# Altium PCB DeskClock.PcbDoc
Units mil, origin at the board's own origin, x right, y up, seen from the top; angles counter-clockwise.
Board outline 3160 x 2510 mil, 2 copper layers (Top Layer, Bottom Layer); 40 components, 48 nets, 191 pads, 47 vias.
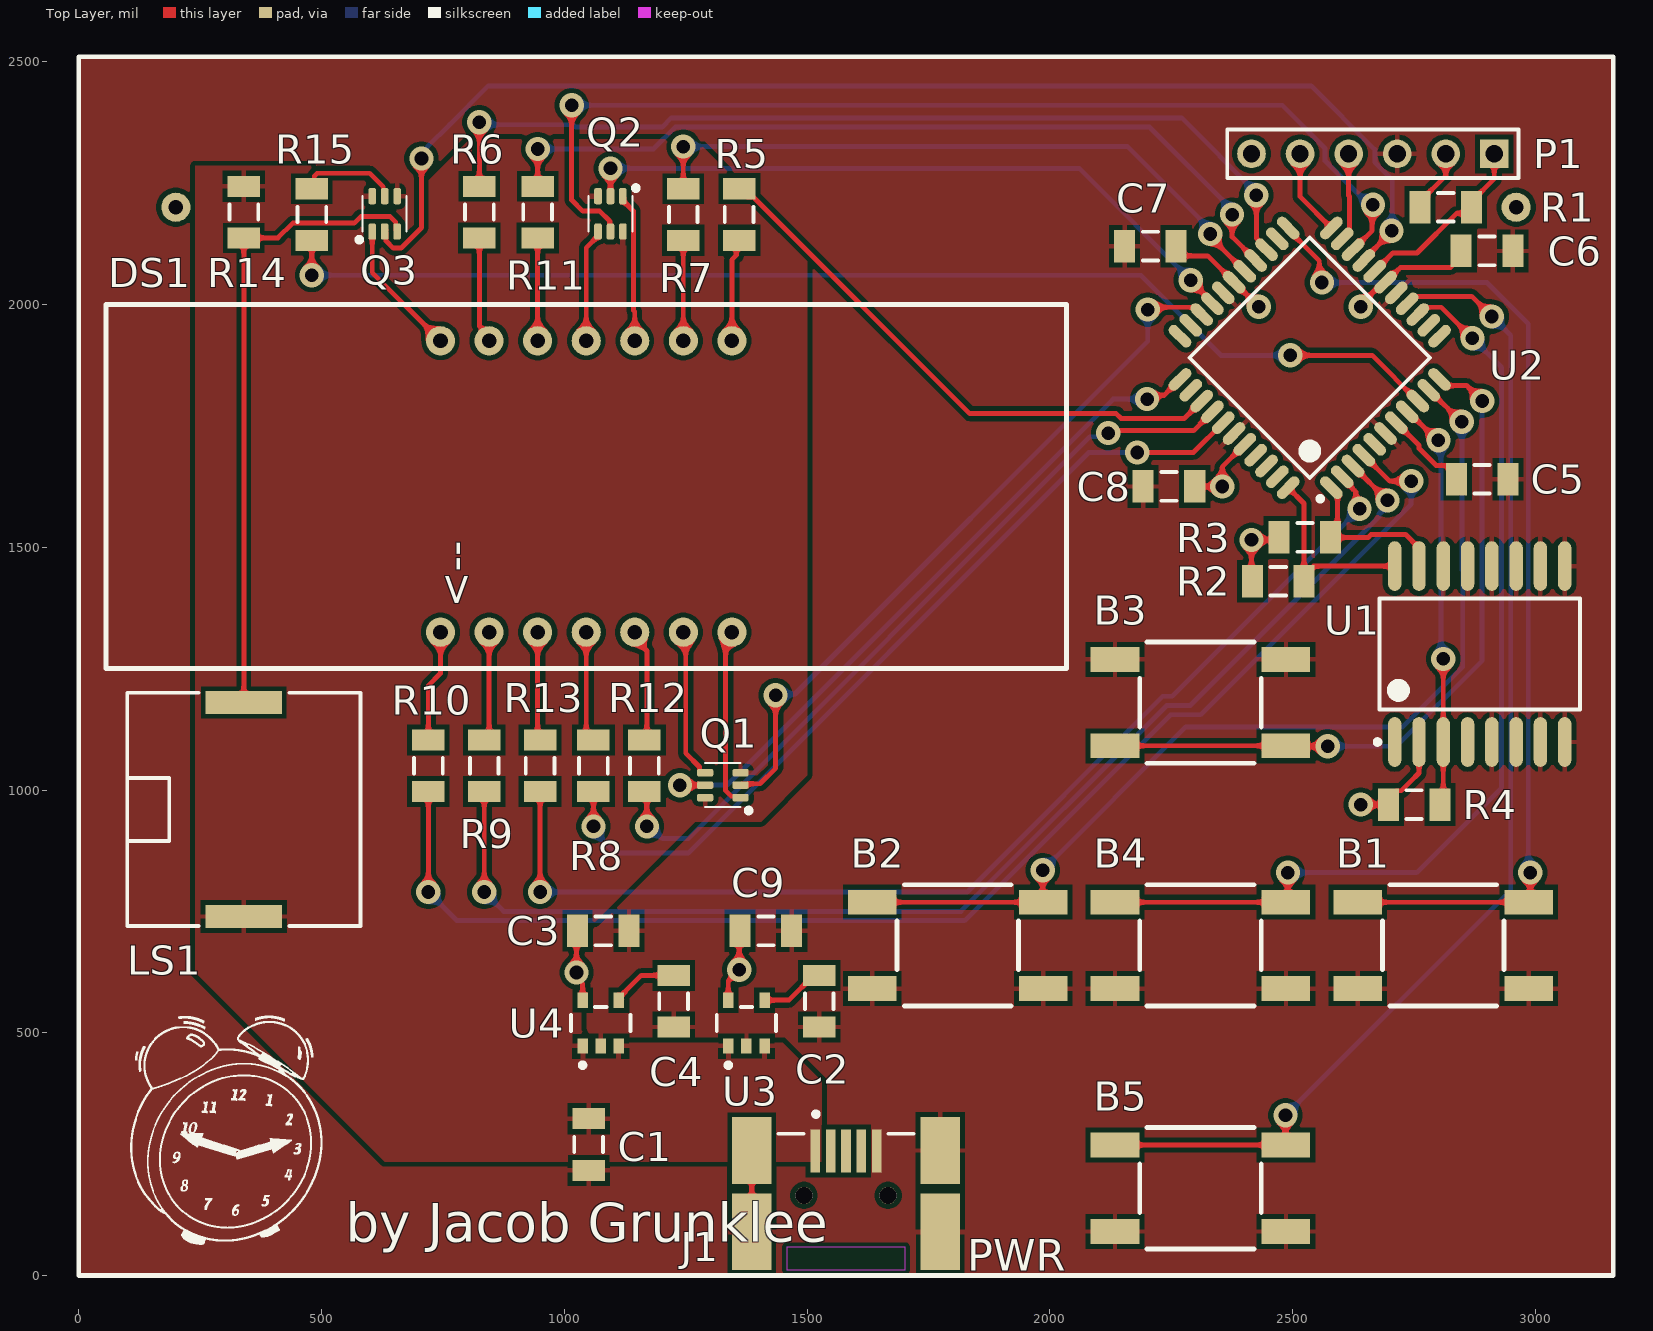
[diagram p0: Top Layer view]
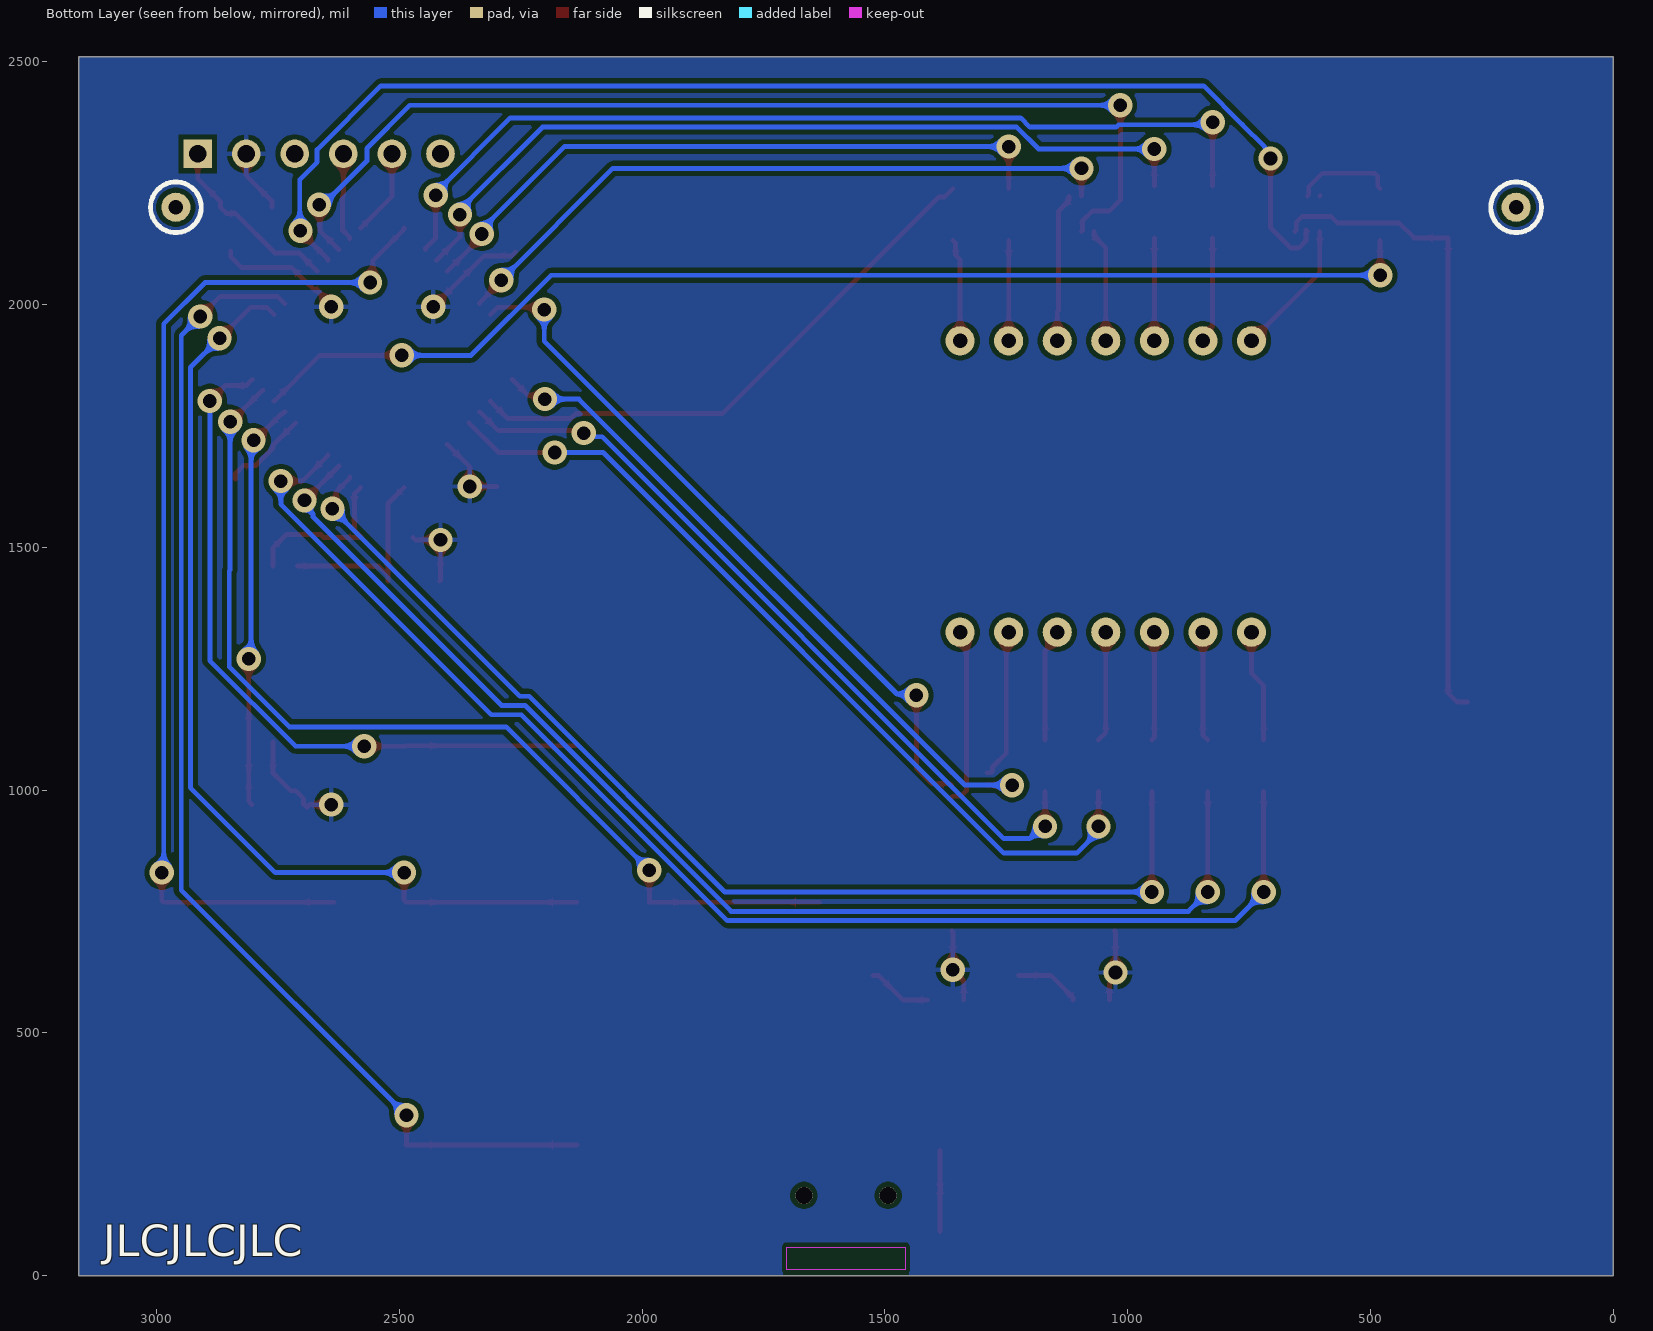
[diagram p1: Bottom Layer view, seen from below]

## Layer stack, top to bottom
Top Solder: solder mask 0.4, Solder Resist, Dk 3.5
Top Layer: signal copper 1.4
Dielectric 1: dielectric 12.6, FR-4, Dk 4.8
Bottom Layer: signal copper 1.4
Bottom Solder: solder mask 0.4, Solder Resist, Dk 3.5

## Board outline
0,0 0,2510 3160,2510 3160,0

## Design rules (kind name [scope] priority, off if disabled: settings)
Clearance [All] p1: gap=10 ignorepadtopadclearanceinfootprint=FALSE except(0: Arc-Hole Track-Hole SMDPad-Hole THPad-Hole Via-Hole Fill-Hole Poly-Hole Region-Hole Text-Hole; 9: Arc-Arc Arc-Track Arc-SMDPad Track-Track Track-SMDPad SMDPad-SMDPad)
MinimumSolderMaskSliver [All] p1: minsoldermaskwidth=1.8
PolygonConnect [All] p1: connectstyle=Relief reliefconductorwidth=10 reliefentries=4 polygonreliefangle="90 Angle" airgapwidth=10
RoutingVias [All] p1: holewidth=28 width=50 viastyle="Through Hole" minholewidth=28 minwidth=50 maxholewidth=28 maxwidth=50
SilkToSolderMaskClearance [IsPad] p1: minsilkscreentomaskgap=8 clearancetoexposedcopper=TRUE
SolderMaskExpansion [All] p1: expansion=4 istentingtop=FALSE
Width [All] p1: maxlimit=10 minlimit=10 preferedwidth=10
28 further rules are at their usual default settings.

## Components (designator, comment, footprint, x,y, rotation, side; value= is the part's Value field where it differs from the comment)
B1 "APEM ADTSM6**V Tactile Button" ADTSM6**V 2810,680 r0 top
B2 "APEM ADTSM6**V Tactile Button" ADTSM6**V 1810,680 r0 top
B3 "APEM ADTSM6**V Tactile Button" ADTSM6**V 2310,1180 r180 top
B4 "APEM ADTSM6**V Tactile Button" ADTSM6**V 2310,680 r0 top
B5 "APEM ADTSM6**V Tactile Button" ADTSM6**V 2310,180 r0 top
C1 "Cap1uF" C1206 1050,270 r90 top value=1.0uF
C2 "Cap100pF" C1206 1525,565 r90 top value=100pF
C3 "Cap2.2uF" C1206 1080,710 r180 top value=2.2uF
C4 "Cap100pF" C1206 1225,565 r90 top value=100pF
C5 "Cap10uF" C1206 2890,1640 r180 top value=10uF
C6 "Cap100pF" C1206 2900,2110 r180 top value=100pF
C7 "Cap100pF" C1206 2206.85,2120 r0 top value=100pF
C8 "Cap100pF" C1206 2245,1625 r0 top value=100pF
C9 "Cap100pF" C1206 1415,710 r180 top value=100pF
DS1 "KW4 - Common Cathode" KW4-56 1045,1625 r0 top locked
J1 "678038020" FP-678038020-MFG 1580,110 r90 top locked
LS1 "PKLCS1212E2000-R1" FP-PKLCS1212E2000-R1-MFG 340,960 r90 top
P1 "Progr" HDR1X6 2915,2310 r180 top
Q1 "FFB3904" FAIR-SC70-6_V 1362.83,984.41 r90 top
Q2 "FFB3904" FAIR-SC70-6_V 1120.59,2222.83 r180 top
Q3 "FFB3904" FAIR-SC70-6_V 604.41,2150 r0 top
R1 "Res10K" C1206 2815,2200 r180 top value=10K
R2 "Res10K" C1206 2470,1430 r180 top value=10k
R3 "Res10K" C1206 2525,1520 r180 top value=10k
R4 "Res10K" C1206 2750,970 r180 top value=10k
R5 "Res250" C1206 1360,2185 r270 top value=250
R6 "Res250" C1206 825,2190 r270 top value=250
R7 "Res250" C1206 1245,2185 r270 top value=250
R8 "Res250" C1206 1060,1050 r90 top value=250
R9 "Res250" C1206 835,1050 r90 top value=250
R10 "Res250" C1206 720,1050 r90 top value=250
R11 "Res250" C1206 945,2190 r270 top value=250
R12 "Res250" C1206 1165,1050 r90 top value=250
R13 "Res250" C1206 950,1050 r90 top value=250
R14 "Res1K" C1206 340,2190 r270 top value=1K
R15 "Res1K" C1206 480,2185 r90 top value=1K
U1 "DS3231M+" W16MK+1_M 2885,1280 r90 top
U2 "PIC24FJ32GA004-I/PT" TQFP-PT44_L 2535,1890 r135 top locked
U3 "AP2210K-3.3TRG1" FP-SOT25-MFG 1375,520 r90 top
U4 "AP2210K-3.3TRG1" FP-SOT25-MFG 1075,520 r90 top

## Footprints (in the part's own frame and the unit in brackets; to place one, negate y for a bottom-side part, rotate by r counter-clockwise, add the part's x,y. Pads: shape width x height; smd on the part's side, far side on the other; paste and mask are expansions set on the pad)
ADTSM6**V [mil] "Tactile button"
  rect 100x51 smd: 1(-176,89) 2(176,89) 3(-176,-89) 4(176,-89)
  silkscreen extent -125,-125 125,125
C1206 [mm] "Chip Capacitor, Body 3.2x1.6mm, IPC High Density"
  rect 1.1x1.7 smd: 1(-1.35,0) 2(1.35,0)
  silkscreen extent -0.4,-0.75 0.4,0.75, body extent -1.7,-0.9 1.7,0.9, height 1.3
FAIR-SC70-6_V [mm] "SC70, 6-Leads, Body 2x1.25mm, Pitch 0.65mm"
  rrect50% 0.4x0.85 smd: 1(0,0) 2(0.65,0) 3(1.3,0) 4(1.3,1.85) 5(0.65,1.85) 6(0,1.85)
  silkscreen extent -0.8,-0.55 1.8,1.85, body extent -0.43,-0.38 1.73,2.22, height 1.1
FP-678038020-MFG [mm]
  rect 2.25x0.5 smd paste+0 mask+0: 1(3.725,1.6) 2(3.725,0.8) 3(3.725,0) 4(3.725,-0.8) 5(3.725,-1.6)
  rect 4x2.05 smd paste+0 mask+0: 6(-0.5,4.925) 8(-0.5,-4.925)
  rect 3.5x2.05 smd paste+0 mask+0: 7(3.75,4.925) 9(3.75,-4.925)
  round 0.9 hole 0.9 unplated paste-1000 mask+0: ""(1.4,2.2) ""(1.4,-2.2)
  Keep-Out Layer region: -2.5,-3.1 -1.3,-3.1 -1.3,3.1 -2.5,3.1
  silkscreen extent 4.62,-3.52 5.77,3.52, body extent -4.72,-6.05 5.6,6.05, height 0.25
FP-PKLCS1212E2000-R1-MFG [mm]
  rect 1.2x4 smd paste+0 mask+0: 1(-5.6,0) 2(5.6,0)
  silkscreen extent -6.1,-6.1 6.1,6.1, body extent -6.3,-6.2 6.3,6.2, height 0.25
FP-SOT25-MFG [mm]
  rect 0.8x0.55 smd paste+0 mask+0: 1(-1.2,0.95) 2(-1.2,0) 3(-1.2,-0.95) 4(1.2,-0.95) 5(1.2,0.95)
  silkscreen extent -2.32,-1.55 0.85,1.55, body extent -1.7,-1.65 1.7,1.65, height 0.25
HDR1X6 [mm] "Connector; Header; 6 Position"
  rect 1.5x1.5 hole 0.9: 1(0,0)
  round 1.5 hole 0.9: 2(2.54,0) 3(5.08,0) 4(7.62,0) 5(10.16,0) 6(12.7,0)
  silkscreen extent -1.27,-1.27 13.97,1.27
KW4-56 [mil] "Lucky Light 4-Digit 7 segment display 0.56\" digit height"
  round 60 hole 30 unplated: 1(-300,-300) 2(-200,-300) 3(-100,-300) 4(0,-300) 5(100,-300) 6(200,-300) 7(300,-300) 8(300,300) 9(200,300) 10(100,300) 11(0,300) 12(-100,300) 13(-200,300) 14(-300,300)
  silkscreen extent -989,-375 989,375
TQFP-PT44_L [mm] "Thin QFP, 44-Leads, Body 10x10mm, Pitch 0.8mm, IPC High Density"
  oval 1.45x0.55 smd: 1(-5.6,4) 2(-5.6,3.2) 3(-5.6,2.4) 4(-5.6,1.6) 5(-5.6,0.8) 6(-5.6,0) 7(-5.6,-0.8) 8(-5.6,-1.6) 9(-5.6,-2.4) 10(-5.6,-3.2) 11(-5.6,-4) 23(5.6,-4) 24(5.6,-3.2) 25(5.6,-2.4) 26(5.6,-1.6) 27(5.6,-0.8) 28(5.6,0) 29(5.6,0.8) 30(5.6,1.6) 31(5.6,2.4) 32(5.6,3.2) 33(5.6,4)
  oval 0.55x1.45 smd: 12(-4,-5.6) 13(-3.2,-5.6) 14(-2.4,-5.6) 15(-1.6,-5.6) 16(-0.8,-5.6) 17(0,-5.6) 18(0.8,-5.6) 19(1.6,-5.6) 20(2.4,-5.6) 21(3.2,-5.6) 22(4,-5.6) 34(4,5.6) 35(3.2,5.6) 36(2.4,5.6) 37(1.6,5.6) 38(0.8,5.6) 39(0,5.6) 40(-0.8,5.6) 41(-1.6,5.6) 42(-2.4,5.6) 43(-3.2,5.6) 44(-4,5.6)
  silkscreen extent -5.72,-4.45 4.45,4.95, body extent -5,-5 5,5, height 1.2
W16MK+1_M [mm] "SOIC, 16-Leads, Body 10.3x7.5mm, Pitch 1.27mm, IPC Low Density"
  oval 2.6x0.7 smd: 1(-4.6,4.445) 2(-4.6,3.175) 3(-4.6,1.905) 4(-4.6,0.635) 5(-4.6,-0.635) 6(-4.6,-1.905) 7(-4.6,-3.175) 8(-4.6,-4.445) 9(4.6,-4.445) 10(4.6,-3.175) 11(4.6,-1.905) 12(4.6,-0.635) 13(4.6,0.635) 14(4.6,1.905) 15(4.6,3.175) 16(4.6,4.445)
  silkscreen extent -4.72,-5.25 2.9,5.47, body extent -3.8,-5.25 3.8,5.25, height 2.65

## Part data
B1 B2 B3 B4 B5: library part Button, "ADTSM6**V"
C1 C2 C3 C4 C5 C6 C7 C8 C9: library part "Cap Semi", "Capacitor (Semiconductor SIM Model)", LatestRevisionDate=29-May-2009, LatestRevisionNote="IPC-7351 Footprint Added.", PackageDescription="Chip Capacitor", PackageReference=C1206, Published=8-Jun-2000, Publisher="Altium Limited"
DS1: "Lucky Light 4-digit 7 segment clock display"
J1: library part CMP-04767-000002-1, "CONN RCPT USB2.0 MINI AB SMD R/A", Ambient Temperature Range High=+50°C, Ambient Temperature Range Low=0°C, Current Rating=1A, Manufacturer=Molex, Package=0, Temperature="0°C to +50°C", Voltage Rating=30V, Automotive=No, Category=Conn, ComponentLink2Description=Datasheet, ComponentLink2URL=https://www.molex.com/webdocs/datasheets/pdf/en-us/0678038020_IO_CONNECTORS.pdf, Conn Orientation="Right Angle", Contact Material=Gold,Nickel, Device Class L1=Connectors, Device Class L2="USB Connectors", Device Class L3=unset, Digikey Description="CONN RCPT USB2.0 MINI AB SMD R/A", Footprint Url=https://www.molex.com/pdm_docs/sd/678038020_sd.pdf, Height=4.1mm, Is Female=yes, Lead Free=Yes, Manufacturer Part Number=678038020, Mouser Description="Conn Mini-USB Type AB RCP 5 POS 0.8mm Solder RA SMD 5 Terminal 1 Port Embossed T/R", Number Of Contacts=5, Octopart=https://octopart.com/67803-8020-molex-7136109, Pitch=0.8mm, RoHS=TRUE, Shielding=true, Temperature Range High=+50°C, Temperature Range Low=0°C, Usb Standard="USB 2.0"
LS1: library part CMP-06202-000001-1, "AUDIO PIEZO TRANSDUCER 12.5V SMD", Frequency=2kHz, Manufacturer=Murata, Operating Supply Voltage=12.5V, Temperature="-20°C to +70°C", Temperature Range High=+70°C, Temperature Range Low=-20°C, Automotive=No, Category=Speak, ComponentLink2Description=Datasheet, ComponentLink2URL=https://www.murata.com/en-global/products/productdata/8801054425118/SPEC-PKLCS1212E2000-R1.pdf?1517839212000, Device Class L1=Electromechanical, Device Class L2="Audio Products", Device Class L3=Buzzers, Digikey Description="AUDIO PIEZO TRANSDUCER 12.5V SMD", Height=3mm, Lead Free=Yes, Manufacturer Part Number=PKLCS1212E2000-R1, Mouser Description="Piezo buzzer SMD", Octopart=https://octopart.com/pklcs1212e2000-r1-murata-7123179, Package=PKLCS1212E2000-R1, RoHS=TRUE
P1: library part "Header 6", "Header, 6-Pin", LatestRevisionDate=17-Jul-2002, LatestRevisionNote="Re-released for DXP Platform.", Publisher="Altium Limited"
Q1 Q2 Q3: library part CMP-2000-06266-1, "NPN Multi-Chip General Purpose Amplifier, 200 mA, 40 V, -55 to 150 degC, 6-Pin SC70, RoHS, Tape and Reel", Manufacturer=FairchildSemiconductor, Maximum Collector Base Voltage=60V, Maximum Collector Emitter Saturation Voltage=0.2@1mA@10mA, Maximum Collector Emitter Voltage=40V, Maximum DC Collector Current=0.2A, Maximum Operating Frequency=250(Typ)MHz, Maximum Power Dissipation=300mW, Minimum DC Current Gain=40@0.1mA@1V, Operating Temperature=-55to150°C, Package=6SC-70, Package Description="6-Pin Small Outline Transistor, Body 2 x 1.25 mm, Pitch 0.65 mm", Package Reference=SC70-6, Category=GPBJT, Datasheet URL=https://www.fairchildsemi.com/datasheets/FF/FFB3904.pdf, Datasheet Version="Rev. 1.1.1, 12/2013", Manufacturer URL=https://www.fairchildsemi.com/, Mounting=SurfaceMount, Mounting Technology=SurfaceMount, Package URL=https://www.fairchildsemi.com/package-drawings/MA/MAA06A.pdf, Packaging=Tape&Reel, Pin Count=6, Rad Hard=No, Type=NPN
R1 R5 R6 R7 R8 R9 R10 R11 R12 R13 R14 R15: library part Res3, "Resistor", LatestRevisionDate=29-May-2009, LatestRevisionNote="IPC-7351 Footprint Added.", PackageDescription="Chip Resistor", PackageReference=J1-0603, Published=8-Jun-2000, Publisher="Altium Limited"
R2 R3 R4: library part Res1, "Resistor", LatestRevisionDate=17-Jul-2002, LatestRevisionNote="Re-released for DXP Platform.", PackageDescription="Axial Device, Thru-Hole; 2 Leads; 0.3 in Pin Spacing", PackageReference=AXIAL-0.3, Published=8-Jun-2000, Publisher="Altium Limited"
U1: library part CMP-0254-00003-2, "+/-5ppm, MEMS based Real-Time Clock, I2C Interface, 16-Pin SO, -40 to 85 degC, Pb-Free", Code_IPC=SOIC127P1030-16, Code_JEDEC=MS-013-AA, ComponentLink1Description="Manufacturer URL", ComponentLink1URL=http://www.maxim-ic.com, ComponentLink2Description=Datasheet, ComponentLink2URL=http://datasheets.maxim-ic.com/en/ds/DS3231M.pdf, ComponentLink3Description="Package Specification", ComponentLink3URL=http://pdfserv.maxim-ic.com/package_dwgs/21-0042.PDF, DatasheetVersion="Rev 3, Dec-2011", PackageDescription="16-Pin Small-Outline IC, Wide (0.3in), 1.27 mm Pitch, SOIC (W), Pb-Free", PackageReference=W16MK+1, PackageVersion="revD, 2010"
U2: library part CMP-0046-00196-2, "General Purpose 16-Bit Flash Microcontroller, 32KB Flash, 8KB SRAM, 44-Pin TQFP, Industrial Temperature", Code_JEDEC=MS-026, ComponentLink1Description=Datasheet, ComponentLink1URL=http://ww1.microchip.com/downloads/en/DeviceDoc/39881D.pdf, ComponentLink2Description="Packaging Specification", ComponentLink2URL=http://www.microchip.com/stellent/groups/techpub_sg/documents/packagingspec/en012702.pdf, ComponentLink3Description="Microchip.com Home", ComponentLink3URL=http://www.microchip.com/, DatasheetVersion="revD, Feb-2010", PackageDescription="44-Lead Plastic Thin Quad Flatpack (PT) - 10x10x1mm Body, 2.00mm [TQFP]", PackageReference=TQFP-PT44, PackageVersion="revBB, Aug-2009", RevisionNote="Component URLs added."
U3 U4: library part CMP-12756-000023-1, "IC REG LINEAR 3.3V 300MA SOT23-5", Dropout Voltage=250mV, Manufacturer=Diodes, Max Junction Temp=+125°C, Max Supply Voltage=13.2V, Min Supply Voltage=2.5V, Nominal Supply Current=0.01uA, Output Current=300mA, Output Voltage=3.3V, Package=SOT25, Temperature="-40°C to +85°C", Temperature Range High=+85°C, Temperature Range Low=-40°C, Accuracy Percentage=1%, Automotive=No, Category=IC, ComponentLink2Description=Datasheet, ComponentLink2URL=https://www.diodes.com/assets/Datasheets/AP2210.pdf, Device Class L1="Integrated Circuits (ICs)", Device Class L2="Power Management ICs", Device Class L3="Voltage Regulators - Linear", Digikey Description="IC REG LINEAR 3.3V 300MA SOT23-5", Footprint Url=https://www.diodes.com/assets/Package-Files/SOT25.pdf, Height=1.4mm, Lead Free=Yes, Manufacturer Part Number=AP2210K-3.3TRG1, Mouser Description="LDO Voltage Regulators 300mA CMOS LDO 3.3V 250mV", Number Of Outputs=1, Octopart=https://octopart.com/ap2210k-3.3trg1-diodes+inc.-30954630, Output Type=Fixed, RoHS=TRUE, Standoff Height=0.013mm

## Free pads (board coordinates)
  round 60 hole 30 unplated: 4(200,2200) 5(2960,2200)

## Via types
v1: diameter 50, hole 28, Top Layer to Bottom Layer, 47 vias

## Nets (pads, with @x,y where several pads share a name; then routed paths per layer and width w, separated by ;. In a path a pad name is that pad's centre, name@x,y a point inside that pad or via, vN(x,y) a via of type N, cw(c..) or ccw(c..) an arc to the next point about the centre after c; other vN are vias at no path point)
+3.3: C3.2 C6.2 C7.2 C8.2 C9.2 P1.2 R1.2 R2.2 R3.2 R4.2 U1.2 U2.17 U2.28 U2.40 U3.5 U4.5 | length 1432.6
  Top Layer w10: v1@1025,613.35 1037.6,600.75 U4.5 ; v1(1025,624.18) 1025,708.15 C3.2 ; U3.5 1337.6,606.77 v1@1360,629.18 ; v1(1360,630) 1360,708.15 C9.2 ; C7.2@2260,2108.19 2268.19,2100 2325,2100 U2.28 v1(2430,1995) ; C8.2 v1(2355,1625) 2355,1665.46 U2.40 ; R2.2 2415,1431.85 v1(2415,1515) 2466.85,1515 R3.2 ; v1(2640,970) 2685,970 2690,965 2695,970 R4.2 2696.85,981.81 2713.5,998.46 2723.46,998.46 2741.73,1016.73 2760,1035 U1.2 ; v1(2640,1995) 2640,2000 2671.14,2031.14 2676.14,2031.14 U2.17 2691.68,2045.9 2722.08,2076.29 2824.96,2076.29 2846.85,2098.19 C6.2 ; R1.2 2761.85,2211.81 2815,2264.96 P1.2
+5: C1.2 J1.1 LS1.1 Q1.3 Q1.6 Q2.3 Q2.6 Q3.6 R14.1 U3.1 U3.3 U4.1 U4.3 | length 5.3
  Top Layer w10: Q3.6@603.33,2223.92 Q3.6 ; Q1.3 1362.83,1036.3 Q1.3@1365,1038.46
AN:: DS1.8 R5.2 | length 213.1
  Top Layer w10: DS1.8 1345,2091.83 1354.22,2101.05 1354.22,2126.07 R5.2
ANA: DS1.13 R6.2 | length 220.1
  Top Layer w10: R6.2 825,1955.86 845,1935.86 DS1.13
ANB: DS1.9 R7.2 | length 206.9
  Top Layer w10: DS1.9 R7.2
ANC: DS1.4 R8.2 | length 228.1
  Top Layer w10: DS1.4 1045,1118.15 R8.2
AND: DS1.2 R9.2 | length 230.1
  Top Layer w10: R9.2 845,1113.15 845,1310 840,1315 845,1320 DS1.2
ANDP: DS1.3 R13.2 | length 223.9
  Top Layer w10: DS1.3 945,1108.15 R13.2
ANE: DS1.1 R10.2 | length 232.2
  Top Layer w10: R10.2 720,1215 745,1240 DS1.1
ANF: DS1.12 R11.2 | length 211.9
  Top Layer w10: DS1.12 R11.2
ANG: DS1.5 R12.2 | length 232.2
  Top Layer w10: DS1.5 1145,1311.47 1170,1286.47 R12.2@1170,1103.15
B1: B1.1 B1.2 U2.23 | length 2147.2
  Top Layer w10: U2.23 2490.46,2154.1 2554.56,2090 2554.56,2050.44 v1(2560,2045) ; B1.1 B1.2 2989,772 v1(2989,830)
  Bottom Layer w10: v1(2560,2045) 2900,2045 2985,1960 2985,834 v1(2989,830)
B2: B2.1 B2.2 U2.10 | length 2057.3
  Top Layer w10: B2.1 B2.2 1985,770 v1(1985,835) ; U2.10 2781.53,1823.19 2846.61,1758.11 v1(2848.16,1758.11)
  Bottom Layer w10: v1(1985,835) 2280,1130 2726.57,1130 2850,1253.43 2850,1451.32 2848.16,1453.16 v1(2848.16,1758.11)
B3: B3.1 B3.2 U2.11 | length 1472.2
  Top Layer w10: B3.2 B3.1 2487,1090 v1(2572,1090) ; U2.11 2814.78,1832.93 2858.18,1832.93 v1(2890,1801.11)
  Bottom Layer w10: v1@2570,1090 v1(2572,1090) 2713.44,1090 2890,1266.56 v1(2890,1801.11)
B4: B4.1 B4.2 U2.14 | length 2022.1
  Top Layer w10: B4.1 B4.2 2490,773 v1(2490,830) ; U2.14 2772.47,1993.84 2781.9,1993.84 2782.23,1994.17 2805.83,1994.17 v1(2870,1930)
  Bottom Layer w10: v1(2490,830) 2755,830 2930,1005 2930,1870 v1(2870,1930)
B5: B5.1 B5.2 U2.15 | length 2464.7
  Top Layer w10: B5.1 B5.2 2485,270 v1(2485,330) ; U2.15 2750.2,2016.11 2759.63,2016.11 2759.95,2016.44 2868.56,2016.44 v1(2910,1975)
  Bottom Layer w10: v1(2485,330) 2949,794 2949,1936 v1(2910,1975)
BUZZ: R15.1 U2.9 | length 2456.9
  Top Layer w10: v1(480,2060) R15.1 ; v1(2495,1895) 2663.63,1895 U2.9
  Bottom Layer w10: v1(480,2060) 2187.24,2060 2352.24,1895 v1(2495,1895)
CA1: DS1.14 Q3.1 | length 283.2
  Top Layer w10: Q3.1 604.41,2065.59 DS1.14
CA2: DS1.11 Q2.4 | length 235.1
  Top Layer w10: DS1.11 1045,2116.73 1069.41,2141.14 Q2.4
CA3: DS1.10 Q2.1 | length 307.9
  Top Layer w10: Q2.1 1120.59,2213.98 1142.46,2192.1 1142.46,1987.54 1145,1985 DS1.10
CA4: DS1.6 Q1.4 | length 313.2
  Top Layer w10: DS1.6 1250,1320 1250,1075.59 1278.27,1047.32 1278.27,1038.46 1281.14,1035.59 Q1.4
CA:: DS1.7 Q1.1 | length 368.3
  Top Layer w10: DS1.7 1345,1311.47 1332.1,1298.57 1332.1,998.63 1343.45,987.28 1359.96,987.28 Q1.1
GND: B1.3 B1.4 B2.3 B2.4 B3.3 B3.4 B4.3 B4.4 B5.3 B5.4 C1.1 C2.1 C3.1 C4.1 C5.1 C6.1 C7.1 C8.1 C9.1 J1.5 J1.6 J1.7 J1.8 J1.9 P1.3 Q3.4 U1.5 U1.6 U1.7 U1.8 U1.9 U1.10 U1.11 U1.12 U1.13 U1.14 U2.6 U2.16 U2.29 U2.39 U3.2 U4.2 | length 167.3
  Top Layer w10: J1.6 J1.7
MCLR: P1.1 R1.1 U2.18 | length 383.5
  Top Layer w10: U2.18 2706.32,2105.87 2755.87,2105.87 2837.35,2187.35 2855.5,2187.35 R1.1 2868.15,2211.81 2915,2258.66 P1.1
NetC2_2: C2.2 U3.4 | length 133.7
  Top Layer w10: U3.4 1462.28,567.24 1513.19,618.15 C2.2
NetC4_2: C4.2 U4.4 | length 136.6
  Top Layer w10: U4.4 1112.4,572.17 1158.39,618.15 C4.2
NetLS1_2: LS1.2 Q3.3 R14.2 | length 1341.2
  Top Layer w10: LS1.2@300,1180.94 321.38,1180.94 340,1199.57 R14.2 410.08,2136.85 440.74,2167.5 567.5,2167.5 580.73,2180.73 641.37,2180.73 652.72,2169.38 652.72,2152.87 Q3.3
NetQ3_5: Q3.5 R15.2 | length 204.7
  Top Layer w10: R15.2 485,2243.15 485,2264.14 490.86,2270 599.34,2270 627.13,2242.22 627.13,2225.71 Q3.5
PGC: P1.5 U2.22 | length 179.5
  Top Layer w10: P1.5 2515,2221.8 U2.22
PGD: P1.4 U2.21 | length 182.1
  Top Layer w10: U2.21 2601.81,2138.14 2616.9,2153.22 2616.9,2222.47 2615,2224.37 P1.4
RA0: Q3.2 U2.19 | length 2617.6
  Top Layer w10: Q3.2@632.87,2152.87 Q3.2 632.87,2147.13 632.87,2130.62 647.6,2115.89 663.58,2115.89 705.8,2158.11 v1(705.8,2300.4) ; U2.19 2646.36,2092.47 2703.43,2149.54 v1(2703.43,2151.57)
  Bottom Layer w10: v1(705.8,2300.4) 705.8,2311.23 718.1,2323.53 718.1,2324.67 763.65,2370.22 843.43,2450 2537.97,2450 2669.22,2318.75 2669.22,2292.81 2705,2257.03 2705,2153.14 v1(2703.43,2151.57)
RA1: Q2.5 U2.20 | length 2173
  Top Layer w10: v1(1015,2410) 1015,2215 1037.9,2192.1 1072.9,2192.1 1093.24,2171.76 1093.24,2151.76 Q2.5 ; U2.20 2663.43,2152.06 2663.43,2203.43 v1(2665,2205)
  Bottom Layer w10: v1(1015,2410) 2477.97,2410 2566.46,2321.51 2566.46,2295.57 2657.03,2205 v1(2665,2205)
RA2: Q2.2 U2.30 | length 1414.5
  Top Layer w10: Q2.2 v1(1095,2280) ; v1(2290,2050) 2290,2047.96 2334.56,2003.4 U2.30
  Bottom Layer w10: v1(1095,2280) 2060,2280 v1(2290,2050)
RA3: Q1.2 U2.31 | length 1489.4
  Top Layer w10: Q1.2 1365.71,1012.87 1402.87,1012.87 1435,1045 v1(1435,1195) ; v1(2201.4,1989.27) 2206.29,1994.17 2287.77,1994.17 2288.1,1993.84 2297.53,1993.84 U2.31
  Bottom Layer w10: v1(1435,1195) 1437.65,1197.65 1475,1197.65 2201.4,1924.05 v1(2201.4,1989.27)
RA4: Q1.5 U2.34 | length 1425.8
  Top Layer w10: v1(1238,1010) Q1.5 ; v1(2200,1805) 2207.65,1812.65 2234.94,1812.65 U2.34
  Bottom Layer w10: v1@1240,1010 1335,1010 2130,1805 v1(2200,1805)
RC0: R6.1 U2.25 | length 1933.6
  Top Layer w10: R6.1 v1(825,2375) ; v1(2425,2225) 2425,2136.78 2445.92,2115.86 U2.25
  Bottom Layer w10: v1(825,2375) 830,2370 1018.69,2370 1023.69,2365 1201.56,2365 1220.56,2384 2271,2384 2425,2230 v1(2425,2225)
RC1: R11.1 U2.26 | length 1720.6
  Top Layer w10: R11.1 v1(945,2320) ; v1(2375,2185) 2375,2139.08 U2.26
  Bottom Layer w10: v1(945,2320) 1183.43,2320 1228.43,2365 2205,2365 2375,2195 v1(2375,2185)
RC2: R7.1 U2.27 | length 1358.7
  Top Layer w10: R7.1 v1(1245,2325) ; v1(2330,2145) 2330,2139.54 U2.27
  Bottom Layer w10: v1(1245,2325) 2160,2325 2330,2155 v1(2330,2145)
RC3: R5.1 U2.36 | length 1163.2
  Top Layer w10: R5.1 1376.65,2221.5 1388.5,2221.5 1835,1775 2136.57,1775 2146.57,1765 2276.37,1765 U2.36
RC4: R12.1 U2.37 | length 1610.7
  Top Layer w10: v1(1170,925) R12.1@1170,996.85 ; v1(2120,1735) 2125,1740 2295.92,1740 U2.37
  Bottom Layer w10: v1(1170,925) 1176.57,925 1201.57,900 1255,900 2082.35,1727.35 2112.35,1727.35 v1(2120,1735)
RC5: R8.1 U2.38 | length 1764.5
  Top Layer w10: v1(1060,925) R8.1 ; v1(2180,1695) 2295.23,1695 2356.6,1756.37 U2.38
  Bottom Layer w10: v1(1060,925) 1060,915 1105,870 1255,870 2080,1695 v1(2180,1695)
RC6: R13.1 U2.2 | length 2302.1
  Top Layer w10: v1(950,790) R13.1 ; U2.2 2601.81,1641.86 2629.91,1613.76 2629.91,1586.65 v1(2637.57,1579)
  Bottom Layer w10: v1(950,790) 1829.69,790 2232.69,1193 2251.57,1193 v1(2637.57,1579)
RC7: R9.1 U2.3 | length 2544
  Top Layer w10: v1(835,790) R9.1 ; U2.3 v1(2695,1596.37)
  Bottom Layer w10: v1(835,790) 875,750 1816.56,750 2240.56,1174 2289.14,1174 2677.57,1562.43 2677.57,1568.11 2695,1585.54 v1(2695,1596.37)
RC8: R10.1 U2.4 | length 2777.5
  Top Layer w10: v1(720,790) R10.1 ; U2.4 2699.75,1636.17 v1(2743.83,1636.17)
  Bottom Layer w10: v1(720,790) 779,731 1824.43,731 2248.43,1155 2310.2,1155 2743.83,1588.63 v1(2743.83,1636.17)
SCL: R2.1 U1.16 U2.44 | length 401.1
  Top Layer w10: U2.44 2523.15,1590.06 R2.1@2523.15,1441.81 ; R2.1 R2.1@2523.15,1441.81 ; U1.16 2542.44,1461.1 R2.1@2523.15,1441.81
SDA: R3.1 U1.15 U2.1 | length 347.1
  Top Layer w10: U2.1 2592.07,1610.22 2592.07,1533.92 R3.1 2655.01,1520 2661.3,1526.28 2732.22,1526.28 2760,1498.5 U1.15
TMR_INT: R4.1 U1.3 U2.8 | length 845.8
  Top Layer w10: U2.8 2736.36,1778.64 2740.68,1774.32 2742.72,1774.32 2797.04,1720 v1(2800,1720) ; R4.1 2810,976.85 U1.3 v1(2810,1270)
  Bottom Layer w10: v1(2800,1720) 2805,1715 2805,1275 v1(2810,1270)
VCAP: C5.2 U2.7 | length 182.4
  Top Layer w10: U2.7 2760,1709.54 2760,1703.43 2794.97,1668.46 2820.2,1668.46 2836.85,1651.81 C5.2
pads on no net: J1. J1.2 J1.3 J1.4 P1.6 U1.1 U1.4 U2.5 U2.12 U2.13 U2.24 U2.32 U2.33 U2.35 U2.41 U2.42 U2.43

## Polygon pours and split planes (outlines as drawn)
GND on Top Layer "GND_L01_P004" (solid, pour order 4): 0,2510 0,0 3160,0 3160,2510
+5 on Top Layer "+5_L01_P003" (solid, pour order 3): 1530,235 1530,400 1450,480 1060,480 1035,505 1035,700 1270,935 1405,935 1500,1030 1500,2110 1270,2340 805,2340 660,2195 650,2195 560,2285 240,2285 240,625 630,235
+3.3 on Bottom Layer "+3.3_L02_P002" (solid, pour order 2): 0,0 0,2510 3160,2510 3160,0

## Silkscreen, mask and mechanical layers (free items; w line width, h text height)
Top Overlay:
  drawing of 28 lines, arcs and shapes, not listed
  text "<--" at 806.64,1375 h65 r90
  text "by Jacob Grunklee" at 550,69.43 h80
  text "PWR" at 1830,10 h65
Bottom Overlay:
  circle w10: c2960,2200 r52.2
  circle w10: c200,2200 r52.2
  text "JLCJLCJLC" at 3110,40.02 h65
Mechanical 1:
  the board outline again, w10